# EAGLE board untitled (EAGLE 9.1.0)

No outline drawn. Coordinates in mm, seen from the top.
Copper layers (1*16): Top 0.035mm / dielectric 1.5mm / Bottom 0.035mm
Design rules "default": minimum track width 6mil, minimum drill 0.35mm, track to track 6mil, track to pad 6mil, pad to pad 6mil, via to via 6mil, smd to smd 6mil, copper to edge 40mil, drill to drill 6mil, minimum pad ring 10mil, minimum via ring 8mil, stop-mask expansion 4mil, vias tented up to drill 0mil, thermal gap 10mil

## Footprints (pad centres in the part's own frame; a part is rotated, then mirrored left to right if it is on the bottom)
3,81/1,4 = drill 1.397 pad 3.81 octagon: 1 0,0

## Placement (x,y rotation side)
5V  [3,81/1,4]  -10.16,-43.18 0 top
12V  [3,81/1,4]  -10.16,-68.58 0 top
BAT_GND  [3,81/1,4]  -10.16,-24.13 0 top
BAT_VCC  [3,81/1,4]  -10.16,-17.78 0 top
TO_5V_GND  [3,81/1,4]  -10.16,-36.83 0 top
TO_5V_VCC  [3,81/1,4]  -10.16,-30.48 0 top
TO_12V_GND  [3,81/1,4]  -10.16,-62.23 0 top
TO_12V_VCC  [3,81/1,4]  -10.16,-55.88 0 top

## Library data of the parts
5V 12V BAT_GND BAT_VCC TO_5V_GND TO_5V_VCC TO_12V_GND TO_12V_VCC = wirepad

## Nets
5V: 5V.1
12V: 12V.1
GND: BAT_GND.1 TO_5V_GND.1 TO_12V_GND.1
VCC: BAT_VCC.1 TO_5V_VCC.1 TO_12V_VCC.1

## Tracks (layer width: path | path; a pad name or v marks a point on that pad's centre or on a via)
GND  (2 unrouted)
VCC  (2 unrouted)